# Altium PCB powerboard_4layer.PcbDoc (part 2 of 2)
Units mil, origin at the board's own origin, x right, y up, seen from the top; angles counter-clockwise.
Board outline 3779.53 x 2125.98 mil, 4 copper layers (Top Layer, Mid-Layer 1, Mid-Layer 2, Bottom Layer); 154 components, 94 nets, 450 pads, 392 vias.
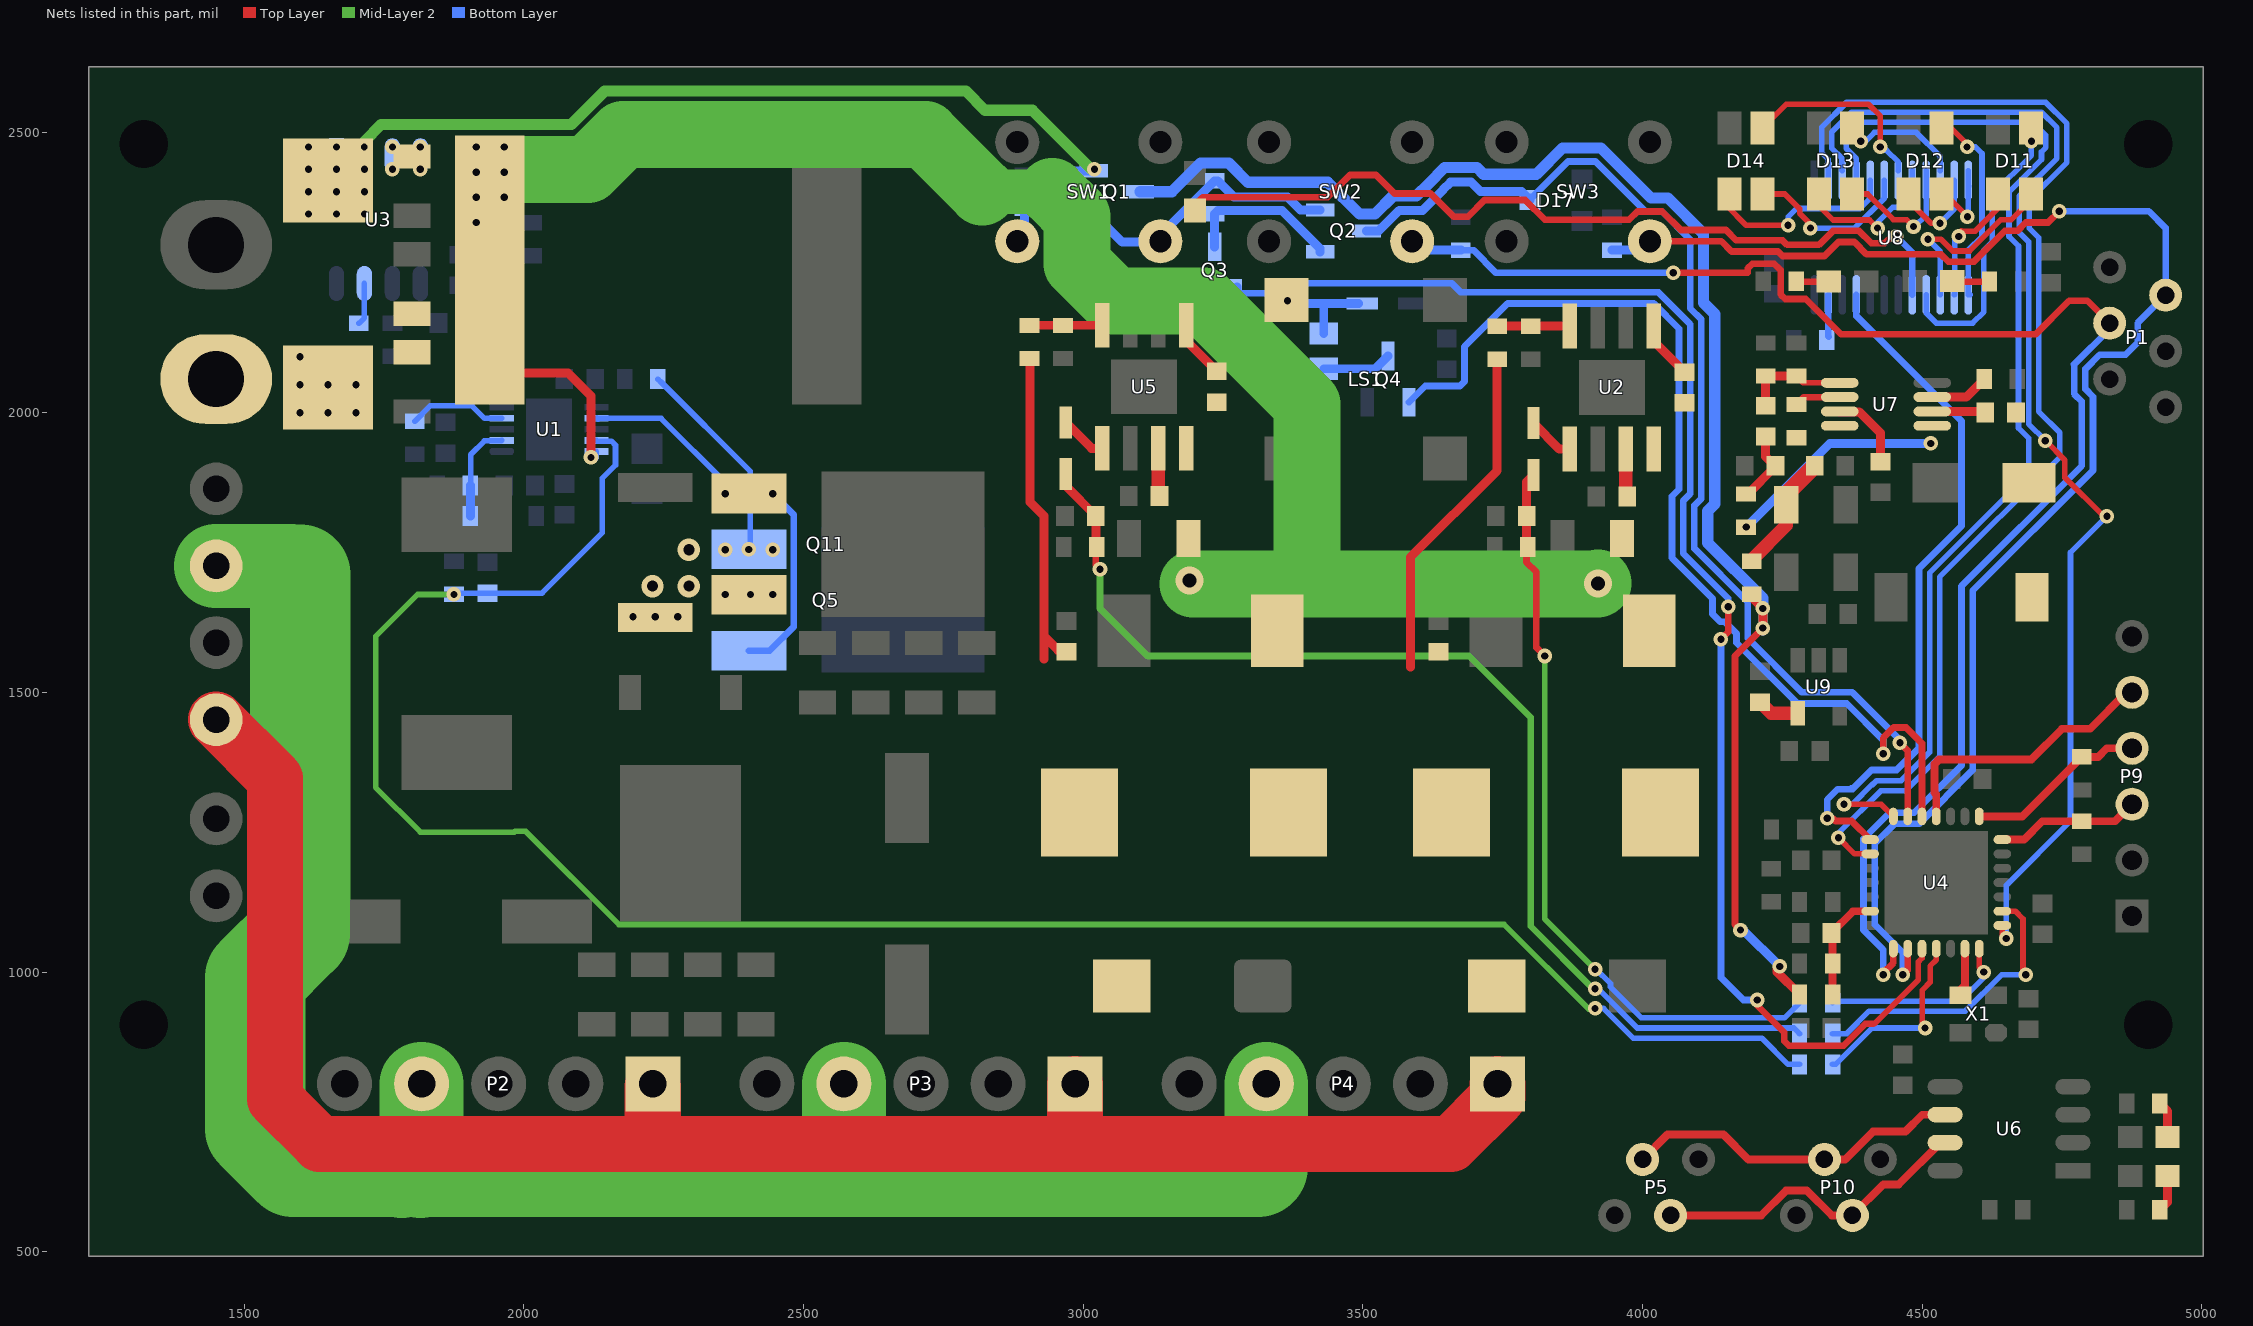
[diagram p4: the nets of this part, all layers, seen from the top]

## Via types
v1: diameter 26, hole 13, Top Layer to Bottom Layer, 148 vias
v2: diameter 26, hole 13, Top Layer to Bottom Layer, tented both sides, 113 vias
v3: diameter 40, hole 20, Top Layer to Bottom Layer, 36 vias
v4: diameter 26, hole 13, Top Layer to Bottom Layer, tented bottom, 23 vias
v5: diameter 40, hole 20, Top Layer to Bottom Layer, tented both sides, 18 vias
v6: diameter 25.98, hole 12.99, Top Layer to Bottom Layer, tented top, 16 vias
v7: diameter 40, hole 20, Top Layer to Bottom Layer, tented top, 13 vias
v8: diameter 32, hole 16, Top Layer to Bottom Layer, tented both sides, 9 vias
v9: diameter 24, hole 13, Top Layer to Bottom Layer, 8 vias
v10: diameter 26, hole 13, Top Layer to Bottom Layer, tented top, 5 vias
v11: diameter 50, hole 25, Top Layer to Bottom Layer, tented both sides, 2 vias
v12: diameter 23.62, hole 11.81, Top Layer to Bottom Layer, tented both sides, 1 vias

## Nets (pads, with @x,y where several pads share a name; then routed paths per layer and width w, separated by ;. In a path a pad name is that pad's centre, name@x,y a point inside that pad or via, vN(x,y) a via of type N, cw(c..) or ccw(c..) an arc to the next point about the centre after c; other vN are vias at no path point) (continued)
NetC29_2: C29.2 D5.1 R22.2 R37.1 | length 1354.8
  Top Layer w12: R22.2@3792.56,1760 3792.56,1732.44 3810,1715 3810,1580 v2(3825,1565)
  Top Layer w16: R22.2@3794.53,1760 3792.56,1761.97 C29.2@3792.56,1815 3792.56,1876.3 D5.1@3805,1888.74
  Mid-Layer 2 w10: v2(3825,1565) 3825,1095 v2(3915,1005)
  Bottom Layer w10: v2@3916.77,1005 3942.54,979.23 3942.54,973.37 3997.91,918 4253.47,918 R37.1@4280.47,945
NetC32_1: C32.1 U2.1 | length 105.2
  Top Layer w16: U2.1@4020,2155 4020,2127.56 C32.1@4075,2072.56
NetC32_2: C32.2 D4.2 L2.1 U2.8
NetC37_1: C37.1 U5.1 | length 105.2
  Top Layer w16: U5.1@3183.83,2156.29 3183.83,2128.84 C37.1@3238.83,2073.84
NetC37_2: C37.2 D6.2 L3.1 U5.8
NetC38_2: C38.2 U7.7 | length 139.8
  Top Layer w16: U7.7@4352.32,2002.2 4353.06,2001.47 4387.23,2001.47 4425,1963.7 C38.2@4425,1912.56
NetC39_1: C39.1 D8.2 L4.1 R29.2 U7.1 | length 391.9
  Top Layer w16: R29.2@4185,1795.47 v4(4185.47,1795.47)
  Bottom Layer w16: v4(4185.47,1795.47) 4335,1945 v2(4515,1945)
NetC39_2: C39.2 U7.2 | length 92.6
  Top Layer w16: U7.2@4517.68,2002.2 C39.2@4610.24,2002.2
NetC40_2: C40.2 C41.2 F2.2 R26.2 U7.8 | length 197.6
  Top Layer w24: F2.2@4195,1734.53 4195,1736.55 4256.85,1798.4 C40.2@4256.85,1835
  Top Layer w30: C40.2@4256.85,1854.41 C41.2@4307.44,1905
NetC42_1: C42.1 C44.2 R29.1 | length 133.7
  Top Layer w16: R29.1@4185,1854.53 4188.06,1854.53 4237.56,1904.03 4220,1921.58 C44.2@4220,1957.44
NetC43_2: C43.2 R27.1 R30.2 U4.27 | length 193.4
  Top Layer w14: C43.2@4337.56,1070 4376.38,1108.82 U4.27@4406.89,1108.82 ; R27.1@4339.53,960 R30.2@4339.53,1015 C43.2@4339.53,1068.03
NetC44_1: C44.1 R31.1 R33.2 U7.5 | length 190.2
  Top Layer w10: R33.2@4275,2065.47 4287.09,2053.39 U7.5@4352.32,2053.39
  Top Layer w16: C44.1@4220,2012.56 R31.1@4220,2065.47 R33.2@4275,2065.47
NetC47_2: C47.2 U9.4 | length 75.8
  Top Layer w24: C47.2@4210,1482.44 4229.69,1462.76 U9.4@4277.6,1462.76
NetC51_2: C51.2 D7.1 R25.2 R38.1 | length 2028
  Top Layer w12: v2@3022.56,1727.44 R25.2@3022.56,1760
  Top Layer w16: D7.1@2968.83,1890.03 2968.83,1869 C51.2@3022.56,1815.27 ; C51.2@3022.56,1815 3022.56,1761.97 R25.2@3024.53,1760
  Mid-Layer 2 w12: v2(3030,1720) 3030,1650 3115,1565 3690,1565 3800,1455 3800,1081.82 3911.82,970 v2(3915,970)
  Bottom Layer w10: v2@3924.54,965.91 3990.46,900 4270.47,900 R38.1@4280.47,890
NetC52_2: C52.2 R36.2 R39.1 U1.9 | length 3704.2
  Mid-Layer 2 w10: v1(1875,1675) 1810,1675 1735,1600 1735,1330 1815,1250 1982.5,1250 1984.22,1251.72 2003.28,1251.72 2170,1085 3752.53,1085 3903.66,933.87 3912.5,933.87 v2@3912.5,932.5
  Bottom Layer w10: R36.2@1876.97,1677.44 C52.2@1935,1677.44 2032.44,1677.44 2140,1785 2140,1882.4 2163.8,1906.2 2163.8,1941.71 2156.48,1949.04 2130.93,1949.04 U1.9@2129.65,1950.32 ; v2(3915,935) 3930,935 3983,882 4213,882 4260,835 R39.1@4280.47,835
NetC55_2: C55.2 Q1.1 Q2.2 R11.1 R12.2 SW1.3 SW1.4 | length 685.1
  Bottom Layer w16: SW1.4@2882.05,2306.42 2895,2319.37 2895,2365 2929.53,2365 2930,2365.47 ; R11.1@2937.87,2367.6 3007.4,2367.6 3070,2305 3137.95,2305 SW1.3@3137.95,2306.42 3137.95,2317.48 R12.2@3235,2414.53 3240.47,2414.53 3269.21,2385.79 3364.92,2385.79 3388.31,2362.4 Q2.2@3423.66,2362.4
NetD1_1: D1.1 R1.2 | length 65.8
  Top Layer w16: R1.2@4924.53,765 4938.46,751.06 D1.1@4938.46,705
NetD3_1: D3.1 R2.2 | length 65.8
  Top Layer w16: R2.2@4924.53,575 4938.46,588.94 D3.1@4938.46,635
NetD5_2: D5.2 U2.5 | length 84.2
  Top Layer w16: D5.2@3805,1981.26 3851.26,1935 U2.5@3870,1935
NetD7_2: D7.2 U5.5 | length 84.2
  Top Layer w16: D7.2@2968.83,1982.54 3015.09,1936.29 U5.5@3033.83,1936.29
NetD9_1: D9.1 R32.1 | length 58.5
  Top Layer w12: R32.1@4274.53,2235 4275.28,2234.25 D9.1@4332.68,2234.25
NetD10_1: D10.1 R34.1 | length 66.9
  Top Layer w12: D10.1@4553.46,2235 4554.21,2234.25 R34.1@4620.08,2234.25
NetD11_1: D11.1 U8.16 | length 515.6
  Top Layer w10: D11.1@4694.53,2508.58 D11.1@4694.53,2509.06 ; v4(4695,2485) D11.1@4695,2508.58
  Bottom Layer w10: U8.16@4507.09,2210.63 4507.09,2177.91 4525,2160 4590,2160 4610,2180 4610,2200 4610,2290.29 4624.71,2305 4624.71,2389.71 4695,2460 v4(4695,2485)
NetD11_3: D11.3 U8.14 | length 228.3
  Top Layer w10: v2(4565,2315) 4565,2320.67 4569.33,2325 4569.94,2324.39 4594.39,2324.39 4635.47,2365.47 D11.3@4635.47,2390.94
  Bottom Layer w10: U8.14@4557.09,2210.63 4558.09,2211.63 4558.09,2308.09 v2(4565,2315)
NetD11_4: D11.4 U8.15 | length 350.1
  Top Layer w10: v2(4510,2310) 4533.23,2310 4546.62,2296.62 4554.23,2289 4584.46,2289 4640.46,2345 4659.09,2345 4694.53,2380.43 D11.4@4694.53,2390.94
  Bottom Layer w10: v2(4510,2310) 4532.09,2287.91 U8.15@4532.09,2210.63
NetD12_1: D12.1 U8.13 | length 360.5
  Top Layer w10: D12.1@4534.53,2509.06 4550.94,2509.06 4580,2480 v2(4580,2475)
  Bottom Layer w10: v2(4580,2475) 4595,2475 4606.71,2463.29 4606.71,2315 4582.09,2290.38 U8.13@4582.09,2210.63 U8.13@4585.63,2210.63
NetD12_3: D12.3 U8.11 | length 177.6
  Top Layer w10: D12.3@4475.47,2385.47 D12.3@4475.47,2390.94 4475.47,2378.86 4515.75,2338.58 v2(4531.5,2338.58)
  Bottom Layer w10: v2(4531.5,2338.58) 4557.09,2364.17 U8.11@4557.09,2415.35
NetD12_4: D12.4 U8.12 | length 156.4
  Top Layer w10: D12.4@4534.53,2390.94 4545.47,2380 4551.1,2380 v2(4580.71,2350.39)
  Bottom Layer w10: v2(4580.71,2350.39) 4582.2,2351.89 U8.12@4582.2,2415.35 ; U8.12@4582.2,2432.36 U8.12@4582.2,2415.35 ; U8.12@4583.38,2405 4582.2,2406.17 U8.12@4582.2,2415.35
NetD13_1: D13.1 U8.10 | length 215.3
  Top Layer w10: D13.1@4374.53,2500.47 v4(4390,2485) ; D13.1@4374.53,2509.06 4375,2509.53 D13.1@4375,2510
  Bottom Layer w10: v4(4390,2485) 4398.23,2485 4414.23,2501 4489.16,2501 4532.2,2457.95 U8.10@4532.2,2432.36
NetD13_3: D13.3 U8.8 | length 285.9
  Top Layer w10: D13.3@4315.47,2390.94 4315.47,2369.53 4340.6,2344.4 4405.6,2344.4 v2(4420,2330)
  Bottom Layer w10: v2@4420,2340 4446.92,2366.92 4465.33,2366.92 4482.2,2383.8 U8.8@4482.2,2415.35 ; U8.8@4482.2,2400.69 U8.8@4482.2,2415.35 ; U8.8@4482.2,2432.36 U8.8@4482.2,2415.35
NetD13_4: D13.4 U8.9 | length 245.5
  Top Layer w10: D13.4@4375.47,2390 D13.4@4374.53,2390.94 4402.36,2390.94 4448.31,2345 4471.93,2345 v2(4484.25,2332.68)
  Bottom Layer w10: v2(4484.25,2332.68) 4486.22,2332.68 4507.2,2353.66 U8.9@4507.2,2432.36
NetD14_1: D14.1 U8.7 | length 355.1
  Top Layer w10: D14.1@4214.53,2509.06 4257.06,2551.58 4403.42,2551.58 4425,2530 4425,2478.62 4426.81,2476.81 v2@4426.81,2473.19
  Bottom Layer w10: v2@4429.13,2474.41 4431.1,2476.38 4431.1,2468.9 4436.1,2468.9 4457.2,2447.8 U8.7@4457.2,2432.36
  other v2: 4425,2475
NetD14_3: D14.3 U8.5 | length 381.1
  Top Layer w10: D14.3@4150,2367.01 D14.3@4150,2390 ; D14.3@4155.47,2390.94 4150.94,2390.94 D14.3@4150,2390 ; v2(4260,2335) 4185,2335 4150,2370 D14.3@4150,2390
  Bottom Layer w10: v2(4260,2335) 4260,2350 4275,2365 4388.4,2365 4407.09,2383.68 U8.5@4407.09,2415.35
NetD14_4: D14.4 U8.6 | length 305.8
  Top Layer w10: D14.4@4214.53,2390.94 4254.06,2390.94 4280.82,2364.18 4280.82,2356.03 4300,2336.85 v2(4300,2330)
  Bottom Layer w10: v2(4300,2330) 4378.86,2330 4432.09,2383.23 U8.6@4432.09,2415.35
NetD15_2: D15.2 U8.17 | length 1505.7
  Top Layer w12: D15.2@3200,2371.54 3213.46,2385 3436.77,2385 3476.77,2425 3523.23,2425 3556.62,2391.62 3620.96,2391.62 3662.57,2350 3687.43,2350 3717.43,2380 3790,2380 3825,2345 3976.06,2345 3990.85,2359.79 4035.06,2359.79 4068.43,2326.42 4149.02,2326.42 4167.44,2308 4250.34,2308 4258.34,2300 4315,2300 4340,2325 4386.82,2325 4408.82,2303 4433,2303 4445.38,2315.38 v2(4453.46,2315.38)
  Bottom Layer w12: v2(4453.46,2315.38) 4482.09,2286.76 U8.17@4482.09,2210.63
NetD17_3: D17.3 Q2.3 U4.20 | length 1983.7
  Top Layer w12: v2(4460,1410) 4473.82,1396.18 U4.20@4473.82,1278.11
  Bottom Layer w12: D17.3@3798.74,2380 3798.74,2381.1 3866.76,2449.12 3915.76,2449.12 4005.09,2359.79 4035.06,2359.79 4085,2309.85 4085,2186.57 4105,2166.57 4105,1846.52 4092.47,1833.99 4092.47,1756.95 ; 4092.47,1766.89 4092.47,1756.95 ; v2(4460,1410) 4460,1415 4375,1500 4285,1500 4188,1597 4188,1661.42 4092.47,1756.95
  Bottom Layer w16: Q2.3@3506.34,2325 3528.23,2325 3565.02,2361.79 3606.79,2361.79 3643,2398 3643,2398.25 3656.75,2412 3693.25,2412 3710.25,2395 3783.74,2395 D17.3@3798.74,2380 ; D17.3@3798.74,2381.1 D17.3@3798.74,2383.93
NetD19_2: D19.2 LS1.2 R35.1 | length 183.1
  Bottom Layer w16: v4(3365,2200) 3370,2195 3430,2195 ; R35.1@3430,2141.5 3430,2195 ; D19.2@3492.49,2195 3430,2195
NetF2_1: F2.1 Q1.3 R27.2 | length 2764.9
  Top Layer w12: v2(4175,1075) 4165,1085 4165,1565 v2(4215,1615)
  Top Layer w16: F2.1@4195,1670 v4(4215,1650) v2(4215,1615) ; v2(4245,1010) 4240,1010 4240,1000.47 R27.2@4280.47,960
  Bottom Layer w16: v2(4175,1075) 4180,1075 v2(4245,1010) v2@4240,1010 ; v2@4215,1610 v2(4215,1615) v4(4215,1650)
  Bottom Layer w20: Q1.3@3101.34,2395 3158.52,2395 3209.83,2446.31 3260.17,2446.31 3294.69,2411.79 3437.13,2411.79 3493.92,2355 3521.46,2355 3554.25,2387.79 3596.02,2387.79 3617,2408.77 3617,2409.02 3645.98,2438 3704.02,2438 3715.81,2426.21 3809.91,2426.21 3856.82,2473.12 3925.7,2473.12 4015.03,2383.79 4045,2383.79 ; 4035.06,2383.79 4045,2383.79 ; v4(4215,1650) 4215,1668.36 4116.47,1766.89 4116.47,1824.05 4129,1836.58 4129,2176.51 4109,2196.51 4109,2319.79 4045,2383.79
NetF3_1: F3.1 X2.1
  other v1: 1600,2000 1650,2000 1700,2000 1600,2050 1650,2050 1700,2050 1600,2100
NetP5_2: P5.2 P10.2 U6.6 | length 610.9
  Top Layer w14: P5.2@4000,665 4044.53,709.53 4144.53,709.53 4189.06,665 P10.2@4325,665 4362.03,665 4412.03,715 4470,715 4500,745 U6.6@4540.83,745
NetP5_3: P5.3 P10.3 U6.7 | length 581.6
  Top Layer w14: P5.3@4050,565 4212.03,565 4256.56,609.53 4293.44,609.53 4337.97,565 P10.3@4375,565 4430.47,620.47 4457.88,620.47 4532.41,695 U6.7@4540.83,695
NetP9_3: P9.3 R8.1 U4.14 | length 258.1
  Top Layer w14: U4.14@4643.11,1236.77 4681.77,1236.77 4714.53,1269.53 R8.1@4785,1269.53 4844.53,1269.53 P9.3@4875,1300
NetP9_4: P9.4 R9.1 U4.15 | length 323.7
  Top Layer w14: U4.15@4601.77,1278.11 4678.58,1278.11 R9.1@4785,1384.53 4814.53,1384.53 4830,1400 P9.4@4875,1400
NetP9_5: P9.5 U4.18 | length 501.4
  Top Layer w14: U4.18@4525,1278.11 4525,1317.76 4521.69,1321.07 4521.69,1371.69 4530,1380 4695,1380 4750,1435 4800,1435 4865,1500 P9.5@4875,1500
NetQ2_1: Q2.1 Q3.3 R12.1 | length 284.4
  Bottom Layer w16: Q3.3@3235,2296.34 R12.1@3235,2355.47 3241.32,2361.79 3354.98,2361.79 3423.66,2293.11 Q2.1@3423.66,2287.6
NetQ3_1: Q3.1 U4.3 | length 2600.7
  Top Layer w10: 4412.5,907.5 4414.27,907.5 4492.82,986.05 4492.82,1018.27 4499.41,1024.87 U4.3@4499.41,1041.89
  Top Layer w12: v2(4140,1595) 4153.07,1608.07 v2(4153.07,1653.07) ; v2(4205,950) 4205,940 4253.19,891.81 4253.19,876.69 4261.6,868.28 4359.11,868.28 4398.32,907.5 4412.5,907.5
  Bottom Layer w12: Q3.1@3272.4,2213.66 3330.48,2213.66 3348.82,2232 3371.18,2232 3371.59,2231.59 3658.41,2231.59 3675,2215 4028.28,2215 4085,2158.28 4085,1854.81 4072.47,1842.28 4072.47,1748.67 4153.07,1668.07 v2(4153.07,1653.07) ; v2(4140,1595) 4140,990 4180,950 v2(4205,950)
  Bottom Layer w16: Q3.1@3272.4,2213.66 3275,2216.26 Q3.1@3275,2225
NetQ4_3: Q4.3 R35.2 | length 124.5
  Bottom Layer w16: R35.2@3430,2078.5 3522.17,2078.5 Q4.3@3545,2101.34
NetQ5_G: Q5.1 Q11.1 U1.7 | length 702.1
  Top Layer w16: Q11.1@2402.2,1855.55 2402.76,1855 v2(2445,1855)
  Bottom Layer w10: U1.7@2129.65,1989.68 U1.7@2131.2,1989.68 ; U1.7@2130.43,1990.46 U1.7@2131.2,1989.68 ; U1.7@2132.48,1988.41 U1.7@2131.2,1989.68 ; v2@2365,1855 2360,1860 2360,1875 2245.32,1989.68 U1.7@2131.2,1989.68
  Bottom Layer w12: Q5.1@2402.2,1574.45 2439.45,1574.45 2482.63,1617.63 2482.63,1817.37 2447.5,1852.5 2442.5,1852.5 v2@2440,1855
  other v2: 2360,1855
NetQ5_S: Q5.3 Q11.3 R14.2 R16.2 | length 358.7
  Bottom Layer w10: R14.2@2239.53,2060 R14.2@2244.53,2055 ; R14.2@2244.76,2055.24 2405,1895 2405,1795 Q5.3@2405,1770
  other v1: 2195,1635 2235,1635 2275,1635 2360,1675 2405,1675 2445,1675 2360,1755 2445,1755 2402.2,1755.55
  other v3: 2230,1690 2295,1690 2295,1755
NetR4_2: R4.2 U3.7 | length 106.7
  Bottom Layer w10: R4.2@1705,2159.53 1715,2169.53 U3.7@1715,2230.83 U3.7@1715,2199.53
NetR10_2: R10.2 U8.23 | length 75
  Bottom Layer w12: U8.23@4332.09,2210.63 4332.09,2136.42 R10.2@4332.68,2135.83
NetR15_1: R15.1 R19.2 U1.2 | length 175.8
  Bottom Layer w10: R19.2@1905,1869.53 1905,1925 1929.54,1949.54 1959.57,1949.54 U1.2@1960.35,1950.32
  Bottom Layer w16: R15.1@1905,1815 R19.2@1905,1869.53
NetR17_2: R17.2 U1.4 | length 176
  Bottom Layer w10: R17.2@1805,1984.53 1832.48,2012.01 1907.52,2012.01 1929.84,1989.68 U1.4@1960.35,1989.68
NetR20_1: R20.1 R21.2 U2.4 | length 129.5
  Top Layer w16: R20.1@3740.47,2155 U2.4@3870,2155
NetR23_1: R23.1 R24.2 U5.4 | length 129.5
  Top Layer w16: R23.1@2904.3,2156.29 U5.4@3033.83,2156.29
NetR26_1: R26.1 U7.6 | length 82.8
  Top Layer w12: R26.1@4275,2014.53 4288.27,2027.8 U7.6@4352.32,2027.8
NetR28_2: R28.2 U7.3 | length 106.1
  Top Layer w16: U7.3@4517.68,2027.8 4578.27,2027.8 R28.2@4610.47,2060
NetR37_2: R37.2 U4.7 | length 344.4
  Top Layer w10: U4.7@4601.77,1041.89 4601.77,1008.23 v2(4610,1000)
  Bottom Layer w10: R37.2@4339.53,945 4342.53,948 4568,948 4610,990 v2(4610,1000)
NetR38_2: R38.2 U4.9 | length 533.6
  Top Layer w10: U4.9@4643.11,1108.82 4666.18,1108.82 4680,1095 4680,1000 v2(4685,995)
  Bottom Layer w10: R38.2@4339.53,890 4365,890 4405,930 4576.77,930 4641.77,995 v2(4685,995)
NetR39_2: R39.2 U4.4 | length 346.7
  Top Layer w10: v2(4505,900) 4500,905 4500,967.77 4514,981.77 4514,1010.77 4525,1021.77 U4.4@4525,1041.89
  Bottom Layer w10: R39.2@4339.53,835 4345,835 4410,900 v2(4505,900)
NetU4_6: U4.6 X1.3 | length 90.7
  Top Layer w14: X1.3@4558.5,958.46 4576.18,976.14 U4.6@4576.18,1041.89
NetU4_8: U4.8 U8.3 | length 2152.4
  Top Layer w10: U4.8@4643.11,1083.23 4643.11,1066.89 v2(4650,1060) ; v2(4720,1950) 4755,1915 4755,1883.59 4823.59,1815 v2(4830,1815)
  Bottom Layer w10: U8.3@4357.2,2432.36 4356,2433.57 4356,2455 4338,2473 4338,2501.25 4373.75,2537 4713,2537 4740.5,2509.5 4740.5,2454.59 4673,2387.09 4673,2322.46 4690,2305.46 4690,1980 v2(4720,1950) ; v2(4650,1060) 4650,1155 4765,1270 4765,1750 v2(4830,1815)
NetU4_21: U4.21 U8.4 | length 1986.6
  Top Layer w10: v2(4360,1300) 4426.34,1300 U4.21@4448.23,1278.11
  Bottom Layer w10: v2(4360,1300) 4375,1300 4410.86,1335.86 ; U8.4@4382.09,2415.35 4382.09,2454.37 4364,2472.46 4364,2495.77 4387.23,2519 4701,2519 4693,2511 4705.77,2511 4721,2495.77 4721,2474.23 4713,2466.23 4713,2452.54 4655,2394.54 4655,2315 4672,2298 4672,1972.54 4690,1954.54 4690,1890.46 4513,1713.46 4513,1392.95 4462.05,1342 4418.2,1342 4411.46,1335.26
NetU4_22: U4.22 U8.21 | length 1246.5
  Top Layer w12: v2(4330,1275) 4340,1275 4345,1270 4373.66,1270 U4.22@4406.89,1236.77
  Bottom Layer w12: v2(4330,1275) 4330,1308.18 4348.82,1327 4372,1327 4373.57,1328.57 ; 4375.13,1327 4409.13,1361 4454.18,1361 4494,1400.82 4494,1721.33 4570,1797.33 4570,1985 4382.09,2172.91 U8.21@4382.09,2210.63
NetU4_23: U4.23 U8.2 | length 2161.7
  Top Layer w10: v2(4350,1240) 4378.82,1211.18 U4.23@4406.89,1211.18
  Bottom Layer w10: U8.2@4330,2417.44 U8.2@4332.09,2415.35 4332.09,2452.91 4320,2465 4320,2510 4365,2555 4720.46,2555 4758.5,2516.96 4758.5,2447.13 4691,2379.63 4691,2329.91 4708,2312.91 4708,2002 4746,1964 4746,1921 4531,1706 4531,1385.49 4469.51,1324 4425.66,1324 4350,1248.34 v2(4350,1240)
PGC: P1.5 R7.1 SW3.2 U4.2 | length 2767.9
  Top Layer w12: SW3.2@4012.95,2306.42 4140.74,2306.42 4159.15,2288 4242.05,2288 4250.05,2280 4325,2280 4350,2305 4378.53,2305 4400.53,2283 4533.36,2283 4546.36,2270 4592.33,2270 4647.33,2325 4670,2325 4685,2340 4725,2340 v2(4745,2360) ; v2(4465,995) 4473.82,1003.82 U4.2@4473.82,1041.89
  Bottom Layer w12: v2(4465,995) 4465,1035 4415,1085 4415,1229.91 4450.09,1265 4493.95,1265 4590,1361.05 4590,1681.56 4805,1896.56 4805,2028.44 4791.47,2041.97 4791.47,2078.03 4816.97,2103.53 4863.53,2103.53 4885,2125 4885,2160 P1.5@4935,2210 4935,2330 4905,2360 v2(4745,2360)
  Bottom Layer w16: R7.1@3945,2290.47 3997.01,2290.47 SW3.2@4012.95,2306.42
PGD: P1.4 R6.1 SW2.2 U4.1 | length 2850.5
  Top Layer w12: v2(4055,2250) 4188.19,2250 4188.19,2258.31 4196.1,2266.22 4234.84,2266.22 4242.75,2258.31 ; 4246.75,2255.02 4246.75,2211.48 4254.95,2203.28 4291.72,2203.28 4355,2140 4702.57,2140 4762.57,2200 4795,2200 P1.4@4835,2160 ; v2(4430,995) 4430,998.18 4448.23,1016.41 U4.1@4448.23,1041.89
  Bottom Layer w12: R6.1@3675,2290.47 3697.52,2290.47 3737.99,2250 v2(4055,2250) ; v2(4430,995) 4430,1040 4395,1075 4395,1238.19 4441.81,1285 4485.66,1285 4570,1369.34 4570,1689.85 4785,1904.85 4785,2020.16 4771.47,2033.69 4771.47,2086.16 4771.31,2086.31 4771.47,2086.31 4835,2149.84 P1.4@4835,2160
  Bottom Layer w16: SW2.2@3588.9,2305.47 SW2.2@3587.95,2306.42 3603.9,2290.47 R6.1@3675,2290.47
SPEAKER: Q4.1 U4.19 | length 1836.5
  Top Layer w12: v2(4430,1390) 4430,1418.18 4448.82,1437 4471.18,1437 4499.41,1408.77 U4.19@4499.41,1278.11
  Bottom Layer w12: Q4.1@3582.4,2018.66 3611.43,2047.69 3673.52,2047.69 3681.72,2055.89 3681.72,2117.98 3758.74,2195 4020,2195 4065,2150 4065,1863.09 4052.47,1850.56 4052.47,1740.38 4125,1667.85 4125,1640 4138.93,1626.07 4147.11,1626.07 4168,1605.18 4168,1588.72 4276.72,1480 4365,1480 4430,1415 v2(4430,1390)
VBAT: F3.2 Q1.2 R11.2 U3.1 U3.2 | length 1522.2
  Mid-Layer 2 w20: v1(1715,2435) 1715,2485 1745,2515 2084.69,2515 2144.66,2574.97 2790.03,2574.97 2824.55,2540.45 2909.46,2540.45 3014.91,2435 v2(3020,2435)
  Bottom Layer w16: R11.2@2950,2424.53 2974.53,2424.53 2982.4,2432.4 Q1.2@3018.66,2432.4
  other v1: 1615,2355 1665,2355 1715,2355 1615,2395 1665,2395 1715,2395 1615,2435 1665,2435 1615,2475
  other v10: 1665,2475
  other v12: 1715,2475
VDIG: C33.1 C36.2 L3.2 P2.1 P3.1 P4.1 P7.2 R23.2 | length 3907.6
  Top Layer w16: R23.2@2905,2095 2905,1840 2930,1815 2930,1600 ; 2930,1560 2930,1600 ; C36.2@2970,1575 2955,1575 2930,1600
  Top Layer w100: P7.2@1450,1451.1 1555.24,1345.86 1555.24,1031.39 1555,1031.15 1555,772.79 1635,692.79 2230,692.79 2230,795 2230.59,795.59 2230.59,692.79 2985.59,692.79 ; P3.1@2985.59,800 2985.59,692.79 ; P4.1@3740.59,800 3740.59,775.59 3657.79,692.79 2985.59,692.79
VIN: C20.2 C21.2 C28.2 C30.2 C34.2 C35.2 C54.2 L1.1 U1.10 U2.7 U3.3 U3.4 U5.7 | length 3270.8
  Top Layer w16: L1.1@1938.82,2071.18 2078.82,2071.18 2120,2030 v10@2120,1919.65
  Top Layer w24: C35.2@3133.83,1853.84 U5.7@3133.83,1936.29 ; U2.7@3970,1935 3970,1852.56 C30.2@3972.56,1850
  Mid-Layer 2 w80: 2819.49,2395 2920,2395 ; 2932.3,2382.7 2920,2395 ; 2944.6,2395 2920,2395 ; v11@3190,1695 v11@3196,1695 ; v11(3920,1695) v11@3925,1695
  Mid-Layer 2 w120: v2@1965,2435 2115,2435 2176.97,2496.97 2717.52,2496.97 2819.49,2395 ; 2944.6,2395 2988.92,2350.68 2988.92,2266.08 3055.45,2199.55 3215.45,2199.55 3400,2015 3400,1695 ; v11@3196,1694 3919,1694 v11(3920,1695)
  Bottom Layer w10: v10@2129.65,1919.65 U1.10@2129.65,1930.63
  other v1: 1915,2340 1915,2385 1965,2385 1815,2435 1965,2475
  other v2: 1915,2430 1965,2430 1915,2475
  other v10: 2120,1920 1765,2435 1765,2475 1815,2475
  other v11: 3190,1700
VSERVO: C27.1 C31.2 L2.2 P2.4 P3.4 P4.4 P8.2 R20.2 | length 4087.9
  Top Layer w16: 3585,1545 3585,1741.5 3740,1896.5 R20.2@3740,2095.47
  Mid-Layer 2 w150: P8.2@1450,1726.1 1583.9,1726.1 1600,1710 ; 1781.71,635 1817.2,670.49 P2.4@1817.2,800 ; 1815,635 1815,668.29 1817.2,668.29 ; 2572.2,696.08 P3.4@2572.2,800 ; 3312.2,652.2 3327.2,667.2 P4.4@3327.2,800
  Mid-Layer 2 w180: 1600,1710 1600,1136.98 1599,1135.98 1599,1069 1520,990 1520,720 1587.8,652.2 3312.2,652.2
pads on no net: D17.2 LS1.3 LS1.4 P1.6 SW2.1 SW3.1 U2.2 U2.3 U5.2 U5.3 U8.18 U8.19 U8.20 U8.22

## Polygon pours and split planes (outlines as drawn)
NetC10_2 on Top Layer "Bottom Layer-No Net 1" (solid, pour order 1036): 2845,1540 2845,2245 2825,2265 2825,2335 2640,2520 2310,2520 2260,2470 2260,2000 2310,1950 2440,1950 2480,1910 2480,1565 2540,1565 2565,1540
NetC10_1 on Top Layer "Bottom Layer-No Net 1" (solid, pour order 1034): 2850,1530 2850,1410 2610,1410 2595,1395 2150,1395 2040,1285 1750,1285 1705,1330 1705,1485 1775,1555 2535,1555 2560,1530
VSERVO on Top Layer "Bottom Layer-No Net 1" (solid, pour order 1026): 3580,1070 3580,1180 3265,865 3265,775 3300,740 3355,740 3390,775 3390,815 3435,860 3520,860 3585,925 3725,925
NetC40_2 on Top Layer "Bottom Layer-No Net 1" (solid, pour order 1020): 4385,1985 4270,1985 4255,1970 4255,1940 4275,1920 4275,1900 4290,1885 4325,1885 4330,1890 4330,1920 4355,1945 4365,1945 4385,1965
NetC39_1 on Top Layer "Bottom Layer-No Net 1" (solid, pour order 1019): 4650,2020 4650,1990 4635,1975 4590,1975 4580,1985 4484.27,1985 4475.88,1976.61 4475.88,1954.12 4505,1925 4585,1925 4630,1880 4630,1650 4665,1615 4725,1615 4740,1630 4740,1965 4685,2020
5V on Top Layer "Bottom Layer-No Net 1" (solid, pour order 1021): 4335,1755 4335,1630 4350,1615 4470,1615 4480,1625 4480,1715 4440,1755
GND on Top Layer "Bottom Layer-No Net 1" (solid, pour order 1040): 1245,2595 1605,2595 1605,895 4035,895 3825,685 3825,520 1245,520
VDIG on Top Layer "Bottom Layer-No Net 1" (solid, pour order 1025): 3015,745 3015,830 3160,975 3065,1070 2910,1070 2910,745
VIN on Top Layer "Bottom Layer-No Net 1" (solid, pour order 1030): 3990,1880 3980,1890 3960,1890 3950,1880 3950,1825 3935,1810 3935,1760 3900,1725 3900,1690 3915,1675 3930,1675 3945,1690 3945,1700 3990,1745
VIN on Top Layer "Bottom Layer-No Net 1" (solid, pour order 1029): 3200,1675 3215,1690 3215,1820 3145,1890 3130,1890 3120,1880 3120,1830 3165,1785 3165,1690 3180,1675
GND on Top Layer "Bottom Layer-No Net 1" (solid, pour order 1038): 2840,880 2840,2250 3505,2250 3505,880
GND on Top Layer "Bottom Layer-No Net 1" (solid, pour order 1039): 1600,2595 2830,2595 2830,880 1600,880
NetQ5_S on Top Layer "Bottom Layer-No Net 1" (solid, pour order 1033): 2470,1565 2470,1810 2300,1810 2145,1655 2145,1565
24V on Top Layer "Bottom Layer-No Net 1" (solid, pour order 1035): 1880,985 2480,985 2725,1230 2725,1410 2625,1410 2600,1385 2155,1385 1880,1110
NetF3_1 on Top Layer "Bottom Layer-No Net 1" (solid, pour order 1022): 1735,1965 1735,2130 1595,2130 1565,2160 1395,2160 1350,2115 1350,2015 1400,1965
VBAT on Top Layer "Bottom Layer-No Net 1" (solid, pour order 1024): 1725,2500 1575,2500 1565,2490 1565,2340 1575,2330 1725,2330 1735,2340 1735,2490
VIN on Top Layer "Bottom Layer-No Net 1" (solid, pour order 1023): 1745,2495 1745,2425 1760,2410 1830,2410 1870,2370 1870,2240 1835,2205 1770,2205 1760,2195 1760,2090 1770,2080 1830,2080 1870,2040 1870,2025 1885,2010 1995,2010 2010,2025 2010,2495
GND on Top Layer "Bottom Layer-No Net 1" (solid, pour order 1037): 3515,880 3515,2250 4020,2250 4150,2120 4150,880
DGND on Top Layer "Bottom Layer-No Net 1" (solid, pour order 1041): 2845,2595 2845,2265 4030,2265 4165,2130 4165,875 4155,865 4030,865 3840,675 3840,520 4980,520 4980,2595
VDIG on Top Layer "Bottom Layer-No Net 1" (solid, pour order 1031): 2945,1595 2985,1595 2995,1585 2995,1565 3160,1400 3160,950 3135,925 3015,925 2910,1030 2910,1560
VSERVO on Top Layer "Bottom Layer-No Net 1" (solid, pour order 1032): 3610,1595 3650,1595 3660,1585 3660,1565 3795,1430 3795,925 3685,925 3575,1035 3575,1560
NetC37_2 on Top Layer "Bottom Layer-No Net 1" (solid, pour order 1027): 3185,1975 3175,1975 3170,1970 3170,1880 3230,1820 3230,1760 3290,1700 3290,1210 3300,1200 3435,1200 3445,1210 3445,1770 3260,1955 3260,2035 3215,2035 3200,2020 3200,1990
NetC32_2 on Top Layer "Bottom Layer-No Net 1" (solid, pour order 1028): 4055,2035 4040,2020 4040,1990 4025,1975 4010,1975 4005,1970 4005,1735 3955,1685 3955,1210 3965,1200 4100,1200 4110,1210 4110,2020 4095,2035
NetC10_2 on Bottom Layer "Bottom Layer-No Net 1" (solid, pour order 1015): 2810,2490 2185,2490 2165,2470 2165,2190 2230,2125 2265,2125 2290,2100 2290,2065 2480,1875 2480,1440 2520,1400 2945,1400 2990,1445 2990,2165 2930,2225 2885,2225 2825,2285 2825,2475
AGND on Bottom Layer "Bottom Layer-No Net 1" (solid, pour order 1013): 1690,2080 1625,2145 1625,2280 1645,2300 1740,2300 1750,2310 1940,2310 1985,2355 2105,2355 2105,2260 1925,2080
VIN on Bottom Layer "Bottom Layer-No Net 1" (solid, pour order 1014): 1745,2495 1745,2405 1830,2320 1935,2320 2000,2385 2000,2495
24V on Bottom Layer "Bottom Layer-No Net 1" (solid, pour order 1016): 2130,1385 2030,1285 1645,1285 1645,1125 1755,1125 1825,1055 1825,1025 1870,980 2600,980 2685,1065 2940,1065 3115,890 3245,890 3245,965 2825,1385
GND on Bottom Layer "Bottom Layer-No Net 1" (solid, pour order 1017): 1245,2595 1245,520 3825,520 3825,685 4020,880 4115,880 4115,1635 4025,1725 4025,1865 4040,1880 4040,2135 4010,2165 3765,2165 3700,2100 3700,1950 3515,1950 3515,1080 3505,1080 3505,1950 3405,1950 3105,2250 2890,2250 2830,2310 2830,2595
DGND on Bottom Layer "Bottom Layer-No Net 1" (solid, pour order 1010): 3840,520 3840,675 4030,865 4125,865 4140,880 4140,2020 3980,2180 3760,2180 3685,2105 3685,1965 3410,1965 3140,2235 2905,2235 2845,2295 2845,2595 4980,2595 4980,520
NetQ5_S on Bottom Layer "Bottom Layer-No Net 1" (solid, pour order 1011): 2470,1810 2470,1565 2145,1565 2145,1655 2300,1810
VBAT on Bottom Layer "Bottom Layer-No Net 1" (solid, pour order 1012): 1735,2340 1735,2490 1725,2500 1575,2500 1565,2490 1565,2340 1575,2330 1725,2330
NetF3_1 on Bottom Layer "Bottom Layer-No Net 1" (solid, pour order 1009): 1395,2160 1350,2115 1350,2015 1400,1965 1735,1965 1735,2070 1670,2070 1580,2160
AGND on Bottom Paste "Bottom Layer-No Net" (solid, pour order 1018): 1255.71,2324.23 1255.71,1122.25 1420.28,957.68 1420.28,1035.43 1397.64,1035.43 1342.52,1090.55 1336.61,1096.46 1336.61,2322.83
NetC10_2 on Mid-Layer 1 "Bottom Layer-No Net" (solid, pour order 1006): 2480,1565 2480,1910 2440,1950 2310,1950 2260,2000 2260,2415 2330,2485 2675,2485 2830,2330 2830,2260 2845,2245 2845,1545 2560,1545 2540,1565
NetC10_1 on Mid-Layer 1 "Bottom Layer-No Net 1" (solid, pour order 1005): 2840,1535 2555,1535 2535,1555 1775,1555 1705,1485 1705,1365 1770,1300 2045,1300 2165,1420 2840,1420
GND on Mid-Layer 1 "Bottom Layer-No Net" (solid, pour order 1008): 1245,514.76 1245,2595.47 2830,2595.47 2830,1085 2840,1085 2840,2250 3505,2250 3505,1080 3515,1080 3515,2250 4020,2250 4150,2120 4150,880 4020,880 3820,680 3820,514.76
DGND on Mid-Layer 1 "Bottom Layer-No Net" (solid, pour order 1007): 2845,2270 4025,2270 4165,2130 4165,875 4155,865 4030,865 3840,675 3840,514.76 4980,514.76 4980,2595.47 2845,2595.47
AGND on Mid-Layer 2 "Bottom Layer-No Net" (solid, pour order 1000): 1750,2310 1740,2300 1645,2300 1625,2280 1625,2145 1680,2090 1758.47,2090 1769.27,2079.19 1924.19,2079.19 2105,2260 2105,2365 1995,2365 1940,2310
VIN on Mid-Layer 2 "Bottom Layer-No Net" (solid, pour order 1001): 1745,2495 2025,2495 2025,2410 1935,2320 1745,2320
NetC10_2 on Mid-Layer 2 "Bottom Layer-No Net" (solid, pour order 1003): 2950,1400 2520,1400 2480,1440 2480,1875 2290,2065 2290,2100 2265,2125 2230,2125 2165,2190 2165,2380 2205,2420 2690,2420 2865,2245 2905,2245 2990,2160 2990,1440
DGND on Mid-Layer 2 "Bottom Layer-No Net" (solid, pour order 1002): 2845,2595.47 4980,2595.47 4980,514.76 3840,514.76 3840,675 4030,865 4155,865 4165,875 4165,2130 4030,2265 2845,2265
GND on Mid-Layer 2 "Bottom Layer-No Net" (solid, pour order 1004): 1245,514.76 1245,2595.47 2830,2595.47 2825,2590.47 2825,2250 2870,2250 2870,1055 2880,1055 2880,2250 3505,2250 3505,1095 3515,1095 3515,2250 4020,2250 4150,2120 4150,880 4020,880 3820,680 3820,514.76

## Keep-outs
Keep-Out Layer:
  lines w5: 1245,514.76 1245,2595.47 4980,2595.47 4980,514.76 1245,514.76
Multi-Layer:
  circle w78.74: c4903.54,905.51 r39.37
  circle w78.74: c1320.87,905.51 r39.37
  circle w78.74: c4903.54,2480.32 r39.37
  circle w78.74: c1320.87,2480.32 r39.37

## Other copper
Top Layer:
  pour cut-out: 1575,2180 1390,2180 1330,2120 1330,2010 1395,1945 1745,1945 1755,1955 1755,2145 1610,2145 1595,2130 1735,2130 1735,1965 1400,1965 1350,2015 1350,2115 1395,2160 1565,2160 1595,2130 1610,2145
Bottom Layer:
  pour cut-out: 1390,2180 1330,2120 1330,2010 1395,1945 1745,1945 1755,1955 1755,2090 1680,2090 1590,2180 1575,2180 1565,2170 1565,2160 1580,2160 1670,2070 1735,2070 1735,1965 1400,1965 1350,2015 1350,2115 1395,2160 1565,2160 1565,2170 1575,2180
  text "power board" at 3725,545 h40
  text "M.D." at 1385,540 h40

## Silkscreen, mask and mechanical layers (free items; w line width, h text height)
Top Overlay:
  text "LD2" at 4290,2551.58 h40
  text "LD1" at 4140,2550 h40
  text "LD3" at 4455,2550 h40
  text "LD4" at 4615,2550 h40
  text "ON/OFF" at 2875,2540 h50
  text "SW2" at 3390,2540 h50
  text "SW3" at 3815,2540 h50
  text "-" at 1495,2375 h80
  text "prog" at 4820,2345 h35
  text "BAT-" at 1320,2230 h40 r90
  text "+" at 1565,2140 h80 r90
  text "BAT+" at 1320,1990 h40 r90
  text "-" at 1290,1855 h40 r90
  text "ONCILLA" at 3275,1775 h60
  text "6Vsrv" at 1280,1650 h35 r90
  text "5V" at 4980,1580 h22 r90
  text "-" at 1290,1575 h40 r90
  text "AUX" at 4980,1470 h22 r90
  text "6Vdig" at 1280,1370 h35 r90
  text "SDA" at 4980,1370 h22 r90
  text "SCL" at 4980,1270 h22 r90
  text "-" at 1290,1265 h40 r90
  text "3V3" at 4980,1170 h22 r90
  text "24V" at 1280,1090 h35 r90
  text "DGND" at 4980,1060 h22 r90
  text "AMARSi" at 3895,805 h60
  text "RS485" at 3945,735 h35
  text "RS485" at 4270,735 h35
  text "v1.1" at 1260,535 h40
  text "24V" at 1620,520 h40
  text "6V" at 1785,520 h40
  text "GND" at 1895,520 h40
  text "GND" at 2045,520 h40
  text "6V" at 2200,520 h40
  text "24V" at 2375,520 h40
  text "6V" at 2535,520 h40
  text "GND" at 2650,520 h40
  text "GND" at 2800,520 h40
  text "6V" at 2955,520 h40
  text "24V" at 3130,520 h40
  text "6V" at 3295,520 h40
  text "GND" at 3405,520 h40
  text "GND" at 3555,520 h40
  text "6V" at 3715,520 h40
Mechanical 1:
  lines w1: 1222.44,767.72 5001.97,767.72 ; 1222.44,905.51 1222.44,2618.11 5001.97,2618.11 5001.97,492.13 1222.44,492.13 1222.44,906.3

## Dimensions
1210.63,905.51 to 1204.72,767.72 on Mechanical 1
1204.72,2480.32 to 1206.69,905.51 on Mechanical 1
1210.63,2618.11 to 1204.72,2480.31 on Mechanical 1
1320.87,2631.89 to 1222.44,2627.95 on Mechanical 1
4903.54,2625.98 to 1320.87,2631.89 on Mechanical 1
5001.97,2627.95 to 4903.54,2625.98 on Mechanical 1
5011.81,2618.11 to 5013.78,2480.32 on Mechanical 1
1222.44,482.87 to 5001.97,484.84 on Mechanical 1
1212.6,492.13 to 1204.72,2618.11 on Mechanical 1